# Altium PCB PCB_PowerBtn.PcbDoc
Units mm, origin at the board's own origin, x right, y up, seen from the top; angles counter-clockwise.
Board outline 15.11 x 4.57 mm, 2 copper layers (Top Layer, Bottom Layer), stack 1.721 mm thick; 1 components, 2 nets, 4 pads, 0 vias.
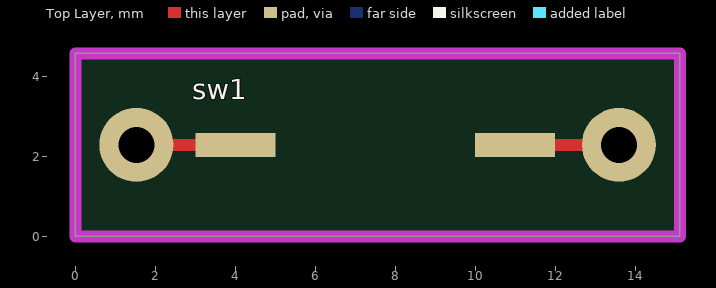
[diagram p0: Top Layer view]
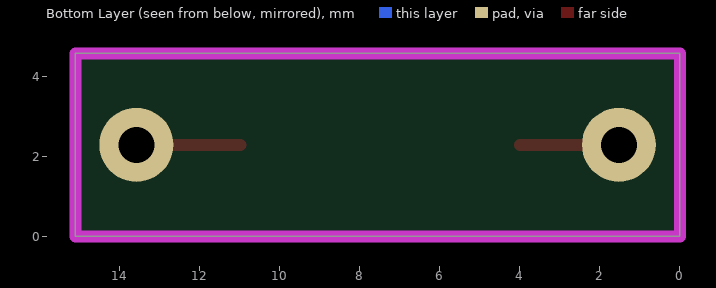
[diagram p1: Bottom Layer view, seen from below]

## Layer stack, top to bottom
Top Solder: solder mask 0.0102, Solder Resist, Dk 3.5
Top Layer: signal copper 0.0356
Dielectric 1: dielectric 1.65, FR-4, Dk 4.8
Bottom Layer: signal copper 0.0356
Bottom Solder: solder mask 0.0102, Solder Resist, Dk 3.5

## Board outline
0,0 15.113,0 15.113,4.572 0,4.572

## Design rules (kind name [scope] priority, off if disabled: settings)
Clearance [All] p1: gap=0.3
PolygonConnect [All] p1: connectstyle=Relief reliefconductorwidth=0.254 reliefentries=4 polygonreliefangle="90 Angle" airgapwidth=0.254
RoutingVias [All] p1: holewidth=0.6 width=1.2 viastyle="Through Hole" minholewidth=0.711 minwidth=1.27 maxholewidth=0.711 maxwidth=1.27
SolderMaskExpansion [All] p1: expansion=0.102
Width [All] p1: maxlimit=0.3 minlimit=0.3 preferedwidth=0.3
30 further rules are at their usual default settings.

## Components (designator, comment, footprint, x,y, rotation, side; value= is the part's Value field where it differs from the comment)
sw1 "tactile_switch_power" tactile_switch_power 7.493,2.286 r180 top

## Footprints (in the part's own frame and the unit in brackets; to place one, negate y for a bottom-side part, rotate by r counter-clockwise, add the part's x,y. Pads: shape width x height; smd on the part's side, far side on the other; paste and mask are expansions set on the pad)
tactile_switch_power [mm]
  rect 2x0.6 smd: 1(-3.492,0) 2(3.493,0)
  body extent -2.93,-1.75 3.07,1.75, height 2.5

## Free pads (board coordinates)
  round 1.85 hole 0.9: 2(13.589,2.286) 3(1.524,2.286)

## Nets (pads, with @x,y where several pads share a name; then routed paths per layer and width w, separated by ;. In a path a pad name is that pad's centre, name@x,y a point inside that pad or via, vN(x,y) a via of type N, cw(c..) or ccw(c..) an arc to the next point about the centre after c; other vN are vias at no path point)
1: pad.2 sw1.1 | length 2.6
  Top Layer w0.3: sw1.1 pad.2
2: pad.3 sw1.2 | length 2.5
  Top Layer w0.3: pad.3 sw1.2

## Keep-outs
Keep-Out Layer:
  the board outline again, w0.3